# EAGLE board plugV5-1 (EAGLE 7.5.0)
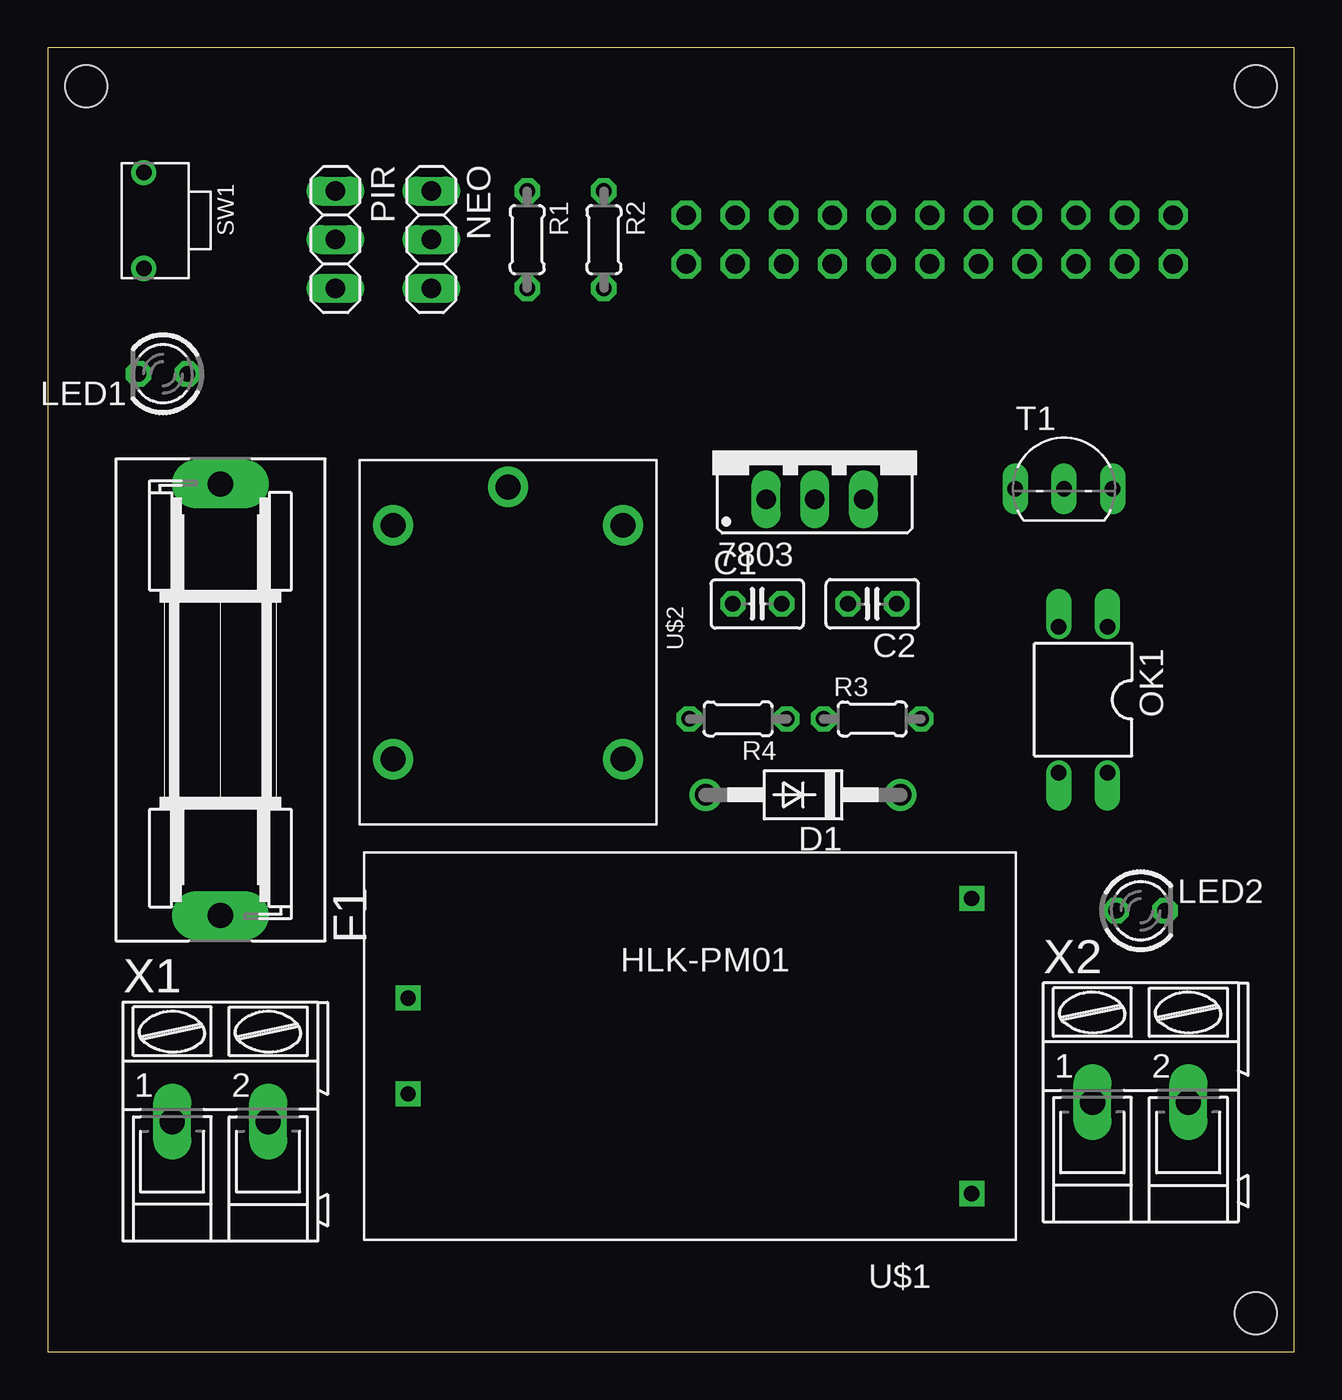
[diagram p0: board, top side]
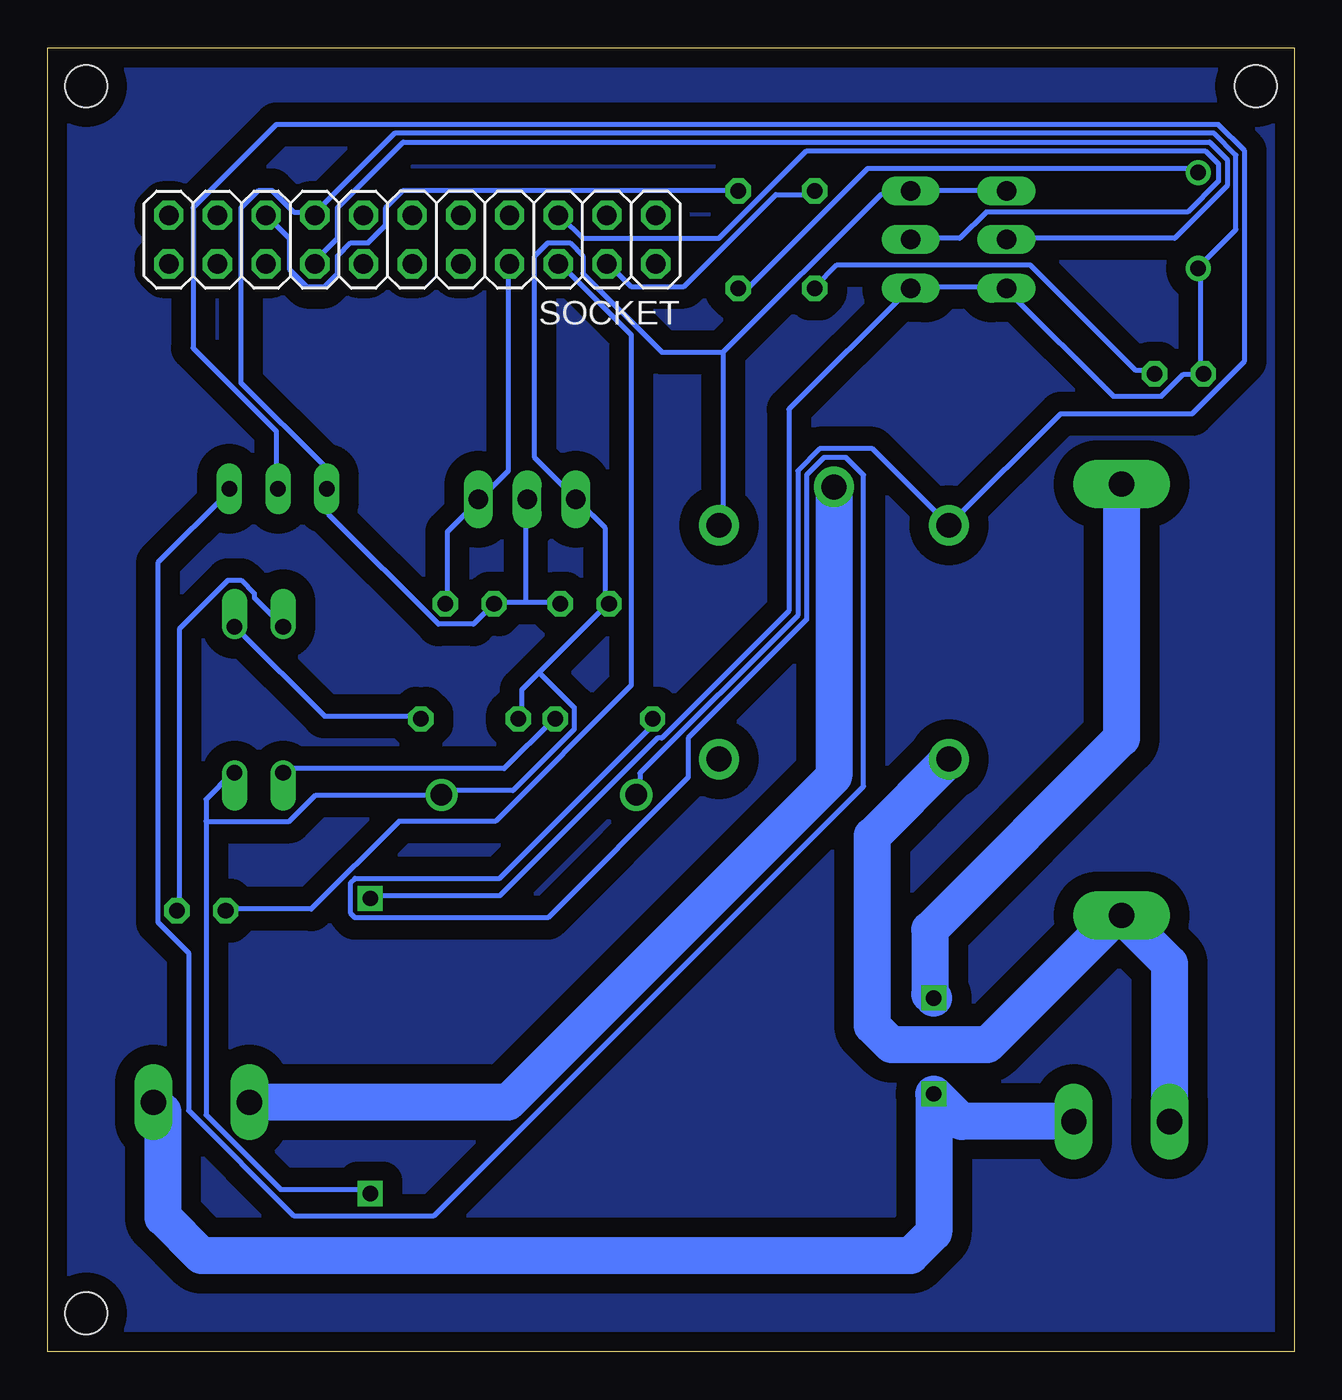
[diagram p1: board, bottom side, seen from below]

Size 65 x 68 mm. Coordinates in mm from the lower left corner, seen from the top.
Outline: 0,0 65,0 65,68 0,68 0,0
Copper layers (1*16): Top 0.035mm / dielectric 1.5mm / Bottom 0.035mm
Design rules "default": minimum track width 10mil, minimum drill 24mil, track to track 8mil, track to pad 8mil, pad to pad 8mil, via to via 8mil, smd to smd 8mil, copper to edge 40mil, drill to drill 8mil, minimum pad ring 10mil, minimum via ring 8mil, stop-mask expansion 4mil, vias tented up to drill 0mil, thermal gap 10mil
Holes 2.2 mm at 2,66 63,66 63,2

## Footprints (pad centres in the part's own frame; a part is rotated, then mirrored left to right if it is on the bottom)
78XXS = drill 1.016 long: GND 0,-2.54; IN -2.54,-2.54; OUT 2.54,-2.54
C025-025X050 = drill 0.813 octagon: 1 -1.27,0; 2 1.27,0
DO41-10 = drill 1.118: A 5.08,0; C -5.08,0
SH22,5A = drill 1.321 pad 2.54 long: 1 -11.252,0; 2 11.252,0
LED3MM = drill 0.813 octagon: A -1.27,0; K 1.27,0
1X03 = drill 1.016 long: 1 -2.54,0; 2 0,0; 3 2.54,0
DIL04 = drill 0.813 offset: 1 -1.27,-3.81; 2 1.27,-3.81; 3 1.27,3.81; 4 -1.27,3.81
0204/5 = drill 0.813 octagon: 1 -2.54,0; 2 2.54,0
2X11 = drill 1.016 octagon: 1 -12.7,-1.27; 2 -12.7,1.27; 3 -10.16,-1.27; 4 -10.16,1.27; 5 -7.62,-1.27; 6 -7.62,1.27; 7 -5.08,-1.27; 8 -5.08,1.27; 9 -2.54,-1.27; 10 -2.54,1.27; 11 0,-1.27; 12 0,1.27; 13 2.54,-1.27; 14 2.54,1.27; 15 5.08,-1.27; 16 5.08,1.27; 17 7.62,-1.27; 18 7.62,1.27; 19 10.16,-1.27; 20 10.16,1.27; 21 12.7,-1.27; 22 12.7,1.27
SW2-5.0-6.0X3.0X4.3MM = drill 0.8 pad 1.27: 1 -2.5,0; 2 2.5,0
TO92-ECB = drill 0.813 long: B 2.54,0; C 0,0; E -2.54,0
HLK-PM01 = drill 0.8 square: +5V 15.19,-7.76; AC1 -14.21,2.44; AC2 -14.21,-2.56; GND 15.19,7.64
RELAY-SONGLE = drill 1.3 pad 2.1: COM -8.1,0; NC 6.1,6; NO 6.1,-6; V+ -6.1,6; V- -6.1,-6
AK300/2 = drill 1.321 long: 1 -2.515,0; 2 2.489,0

## Placement (x,y rotation side)
7803  5to3.3V  [78XXS]  40,47 0 top
C1  0.33uF  [C025-025X050]  37,39 0 top
C2  0.1uF  [C025-025X050]  43,39 180 top
D1  1N4004  [DO41-10]  39.39,29.04 180 top
F1  5A  [SH22,5A]  9,34 90 top
LED1  RED  [LED3MM]  6,51 180 top
LED2  [LED3MM]  57,23 0 top
NEO  [1X03]  20,58 270 top
OK1  PC817  [DIL04]  54,34 180 top
PIR  [1X03]  15,58 270 top
R1  230  [0204/5]  25,58 270 top
R2  470  [0204/5]  29,58 270 top
R3  1k  [0204/5]  43,33 0 top
R4  510  [0204/5]  36,33 180 top
SOCKET  esp8266  [2X11]  46,58 180 bottom
SW1  [SW2-5.0-6.0X3.0X4.3MM]  5,59 270 top
T1  2SC458  [TO92-ECB]  53,45 0 top
U$1  HLK-PM01  [HLK-PM01]  33,16 0 top
U$2  RELAY-SONGLE  [RELAY-SONGLE]  24,37 270 top
X1  220V  [AK300/2]  9,12 0 top
X2  Plug  [AK300/2]  57,13 0 top

## Library data of the parts
7803 = v-reg
C1 C2 R1-R4 = rcl
D1 = diode
F1 = fuse; MPN: 0031.7701.11; OC_FARNELL: unknown; OC_NEWARK: 04F1224
LED1 LED2 = led
NEO PIR SOCKET = pinhead
OK1 = optocoupler; MPN: PC817X4J000F; OC_FARNELL: 9707727; OC_NEWARK: 97K7059
SW1 = Seeed-OPL-Switch
T1 = transistor
U$1 = HLK-PM01
U$2 = Seeed-OPL-Relay
X1 X2 = con-ptr500; OC_FARNELL: unknown; OC_NEWARK: unknown

## Nets
+3V3: 7803.OUT C2.1 SOCKET.8
+5V: 7803.IN C1.1 D1.C NEO.1 OK1.4 PIR.1 R3.1 U$1.+5V U$2.V+
GND: 7803.GND C1.2 C2.2 LED1.K NEO.3 PIR.3 SOCKET.15 SW1.2 T1.E U$1.GND
N$1: F1.1 U$2.NO X1.1
N$2: F1.2 U$1.AC1
N$3: U$1.AC2 X1.2 X2.2
N$4: U$2.COM X2.1
N$7: LED1.A R1.2
N$8: R1.1 SOCKET.4
N$9: PIR.2 SOCKET.16
N$10: NEO.2 SOCKET.5
N$11: R2.2 SW1.1
N$12: R2.1 SOCKET.17
N$13: OK1.1 R3.2
N$14: LED2.A SOCKET.6
N$15: LED2.K OK1.2
N$16: OK1.3 R4.1
N$17: R4.2 T1.B
N$18: D1.A T1.C U$2.V-

## Tracks (layer width: path | path; a pad name or v marks a point on that pad's centre or on a via)
+3V3
  Bottom 0.254: C2.1 44.18,39.09 44.18,42.75 42.58,44.35 7803.OUT 42.35,44.58 40.98,45.95 40.98,56.69 SOCKET.8
+5V
  Bottom 0.254: PIR.1 15.14,60.58 19.95,60.58 NEO.1 20.17,60.35 21.55,60.35 29.77,52.12 | 29.77,52.12 29.77,43.2 U$2.V+ | 39.38,35.43 35.95,38.86 C1.1 35.95,39.09 35.95,42.98 37.32,44.35 7803.IN 37.55,44.58 39.6,46.63 39.6,57.15 38.92,57.84 37.78,57.84 37.09,57.15 37.09,56.24 32.98,52.12 29.77,52.12 | 39.38,35.43 40.29,34.52 40.29,33.15 R3.1 | 39.38,35.43 37.55,33.6 37.55,32.46 40.75,29.26 44.41,29.26 D1.C 44.63,29.03 51.03,29.03 52.41,27.66 56.75,27.66 | 56.75,27.66 56.75,28.8 55.38,30.18 OK1.4 | 56.75,27.66 56.75,12.34 52.86,8.46 48.29,8.46 U$1.+5V
GND
  Bottom 0.254: 40.06,39.09 41.66,39.09 C2.2 41.89,38.86 42.81,37.95 44.63,37.95 50.35,43.66 50.35,44.81 T1.E 50.58,45.03 50.58,46.18 54.92,50.52 54.92,59.66 54.01,60.58 53.32,60.58 52.18,59.44 51.26,59.44 SOCKET.15 51.03,59.44 46.92,63.55 4.17,63.55 3.03,62.41 3.03,58.52 4.86,56.69 SW1.2 4.86,56.46 4.86,51.21 LED1.K 4.86,50.98 5.77,50.98 6.92,49.84 9.43,49.84 14.92,55.32 PIR.3 15.14,55.55 19.95,55.55 NEO.3 20.17,55.32 26.35,49.15 26.35,38.63 32.98,32 33.2,32 41.43,23.77 48.06,23.77 U$1.GND | 40.06,39.09 38.46,39.09 C1.2 | 40.06,39.09 40.06,44.35 7803.GND
N$1
  Bottom 1.93: X1.1 6.49,20.23 F1.1 9.25,22.75 16,16 21,16 22,17 22,26.9 U$2.NO
N$2
  Bottom 1.93: F1.2 9,32 19,22 19,18.65 U$1.AC1
N$3
  Bottom 1.93: X1.2 17.35,12 U$1.AC2 18.79,6.21 20,5 57,5 59,7 59,12.51 X2.2
N$4
  Bottom 1.93: U$2.COM 24,30 41,13 X2.1
N$5
  pour Bottom (isolate 1.016): 0,68 65,68 65,0 0,0
N$7
  Bottom 0.254: LED1.A 7.37,51.21 8.29,51.21 13.77,56.69 23.83,56.69 24.98,55.55 R1.2
N$8
  Bottom 0.254: R1.1 25.2,60.35 27.03,60.35 31.83,55.55 34.58,55.55 35.72,56.69 SOCKET.4
N$9
  Bottom 0.254: PIR.2 14.92,58.06 6.23,58.06 3.49,60.81 3.49,62.18 4.4,63.09 46.46,63.09 49.89,59.66 49.89,58.06 51.03,56.92 SOCKET.16
N$10
  Bottom 0.254: NEO.2 19.95,58.06 17.43,58.06 16.06,59.44 5.54,59.44 3.94,61.04 3.94,61.95 4.63,62.64 25.43,62.64 30,58.06 37.09,58.06 38.23,59.21 SOCKET.5
N$11
  Bottom 0.254: SW1.1 5.09,61.72 22.23,61.72 28.4,55.55 28.86,55.55 R2.2
N$12
  Bottom 0.254: R2.1 29.09,60.58 46.46,60.58 47.38,59.66 47.38,58.75 48.29,57.84 49.21,57.84 49.89,57.15 49.89,56.24 50.58,55.55 51.49,55.55 52.41,56.46 52.41,58.06 53.55,59.21 SOCKET.17
N$13
  Bottom 0.254: R3.2 45.55,33.15 50.58,33.15 55.15,37.72 OK1.1
N$14
  Bottom 0.254: LED2.A 55.61,23.09 51.26,23.09 46.69,27.66 41.66,27.66 34.58,34.75 34.58,53.03 38.23,56.69 SOCKET.6
N$15
  Bottom 0.254: OK1.2 52.86,37.95 54.24,39.32 54.24,39.55 54.92,40.23 55.61,40.23 58.12,37.72 58.12,23.09 LED2.K
N$16
  Bottom 0.254: OK1.3 52.63,30.4 41.2,30.4 38.69,32.92 R4.1
N$17
  Bottom 0.254: R4.2 33.66,32.92 33.66,32.46 41.43,24.69 48.98,24.69 49.21,24.46 49.21,22.86 48.98,22.63 38.92,22.63 31.6,29.95 31.6,32 25.43,38.18 25.43,45.72 24.52,46.63 23.38,46.63 22.46,45.72 22.46,29.49 44.86,7.09 52.18,7.09 57.66,12.57 57.66,20.8 59.27,22.4 59.27,41.15 55.61,44.81 T1.B
N$18
  Bottom 0.254: T1.C 53.09,45.03 53.09,48.01 57.44,52.35 57.44,59.66 53.09,64.01 3.94,64.01 2.57,62.64 2.57,51.66 5.32,48.92 12.17,48.92 17.89,43.2 U$2.V- 18.12,43.2 22,47.09 24.75,47.09 25.89,45.95 25.89,38.41 34.12,30.18 34.12,29.26 D1.A